# Altium PCB PCB1.PcbDoc
Units mil, origin at the board's own origin, x right, y up, seen from the top; angles counter-clockwise.
Board outline 3310 x 2855 mil, 2 copper layers (Top Layer, Bottom Layer); 3 components, 9 nets, 61 pads, 1 vias.
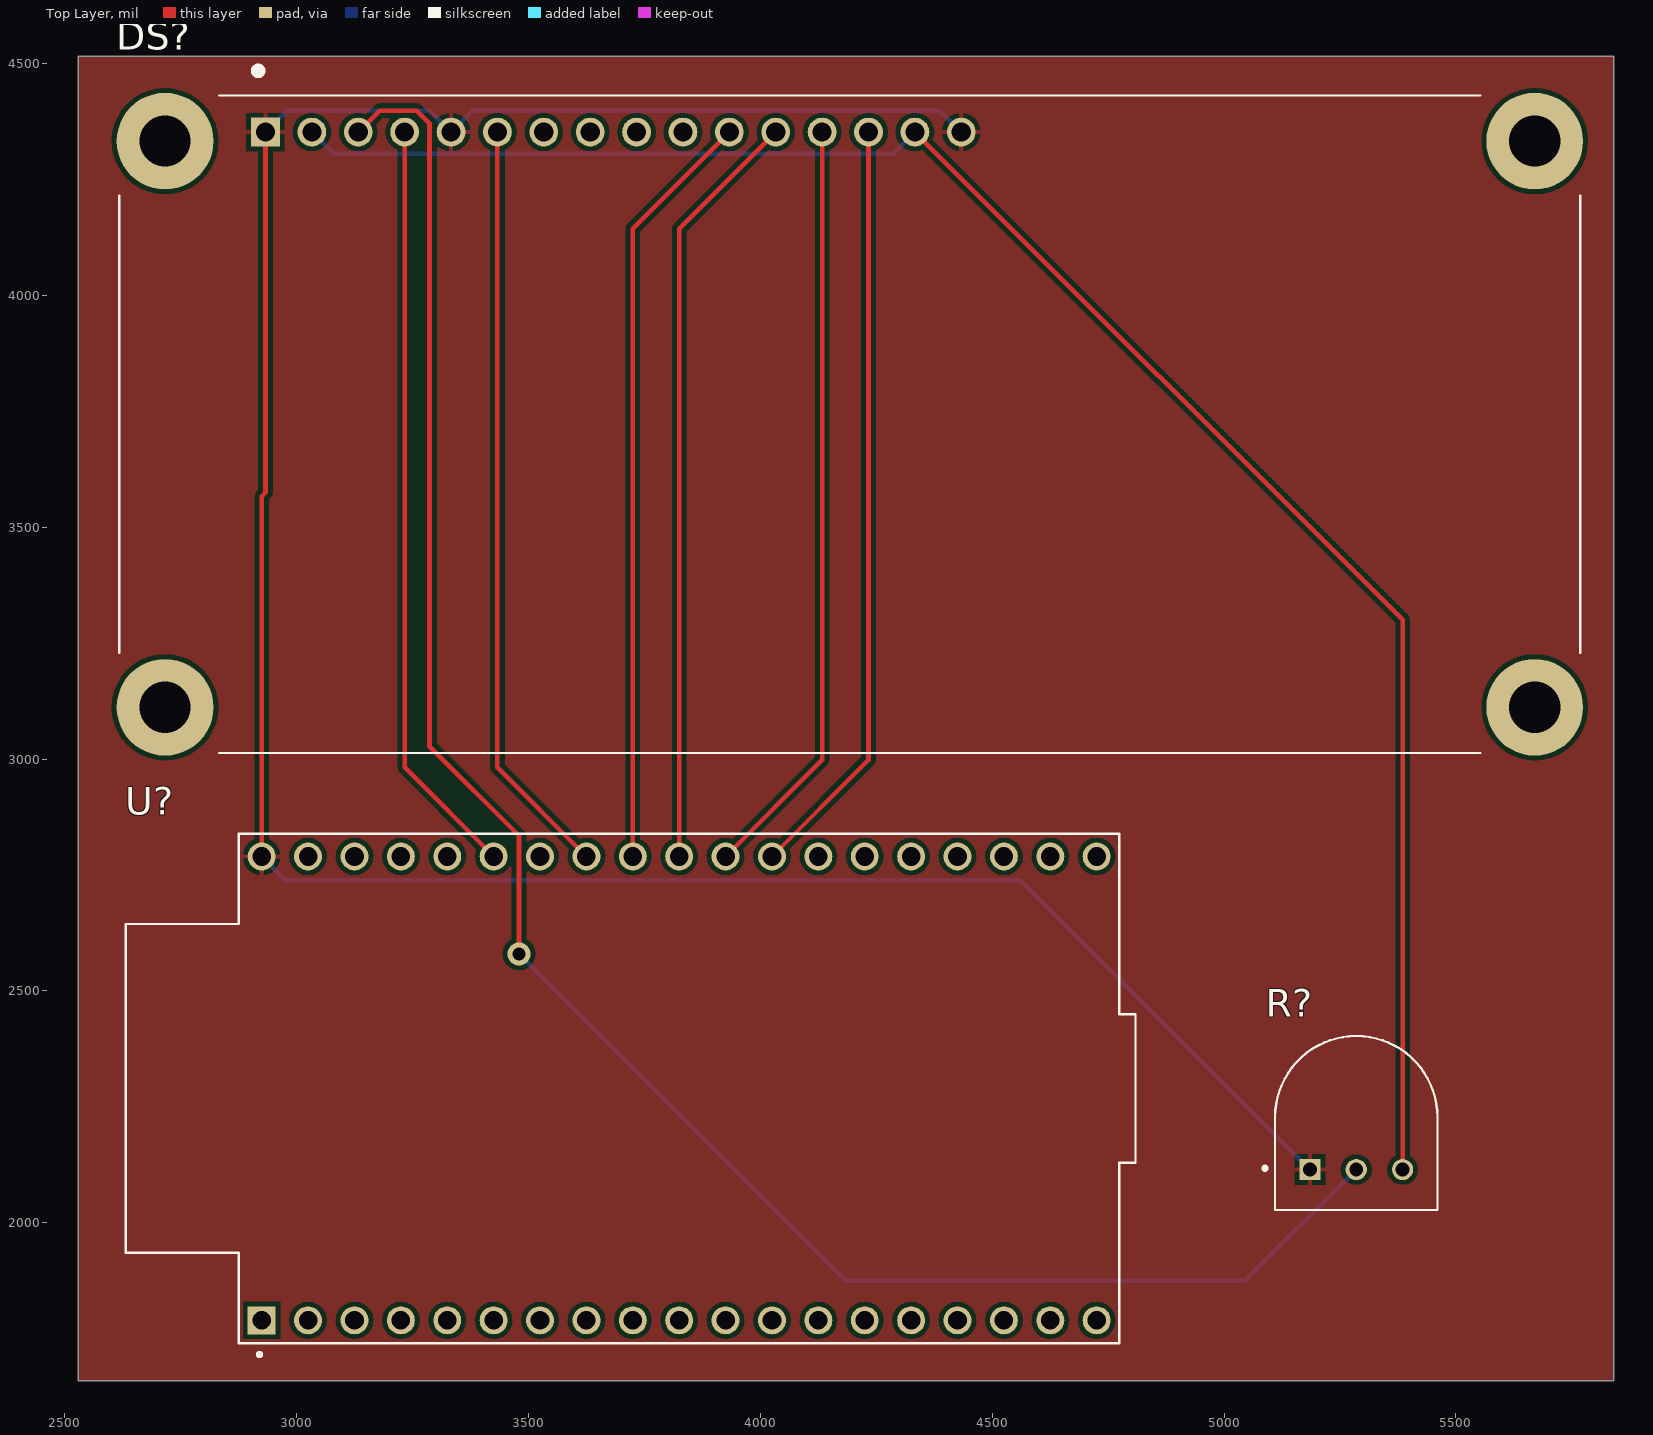
[diagram p0: Top Layer view]
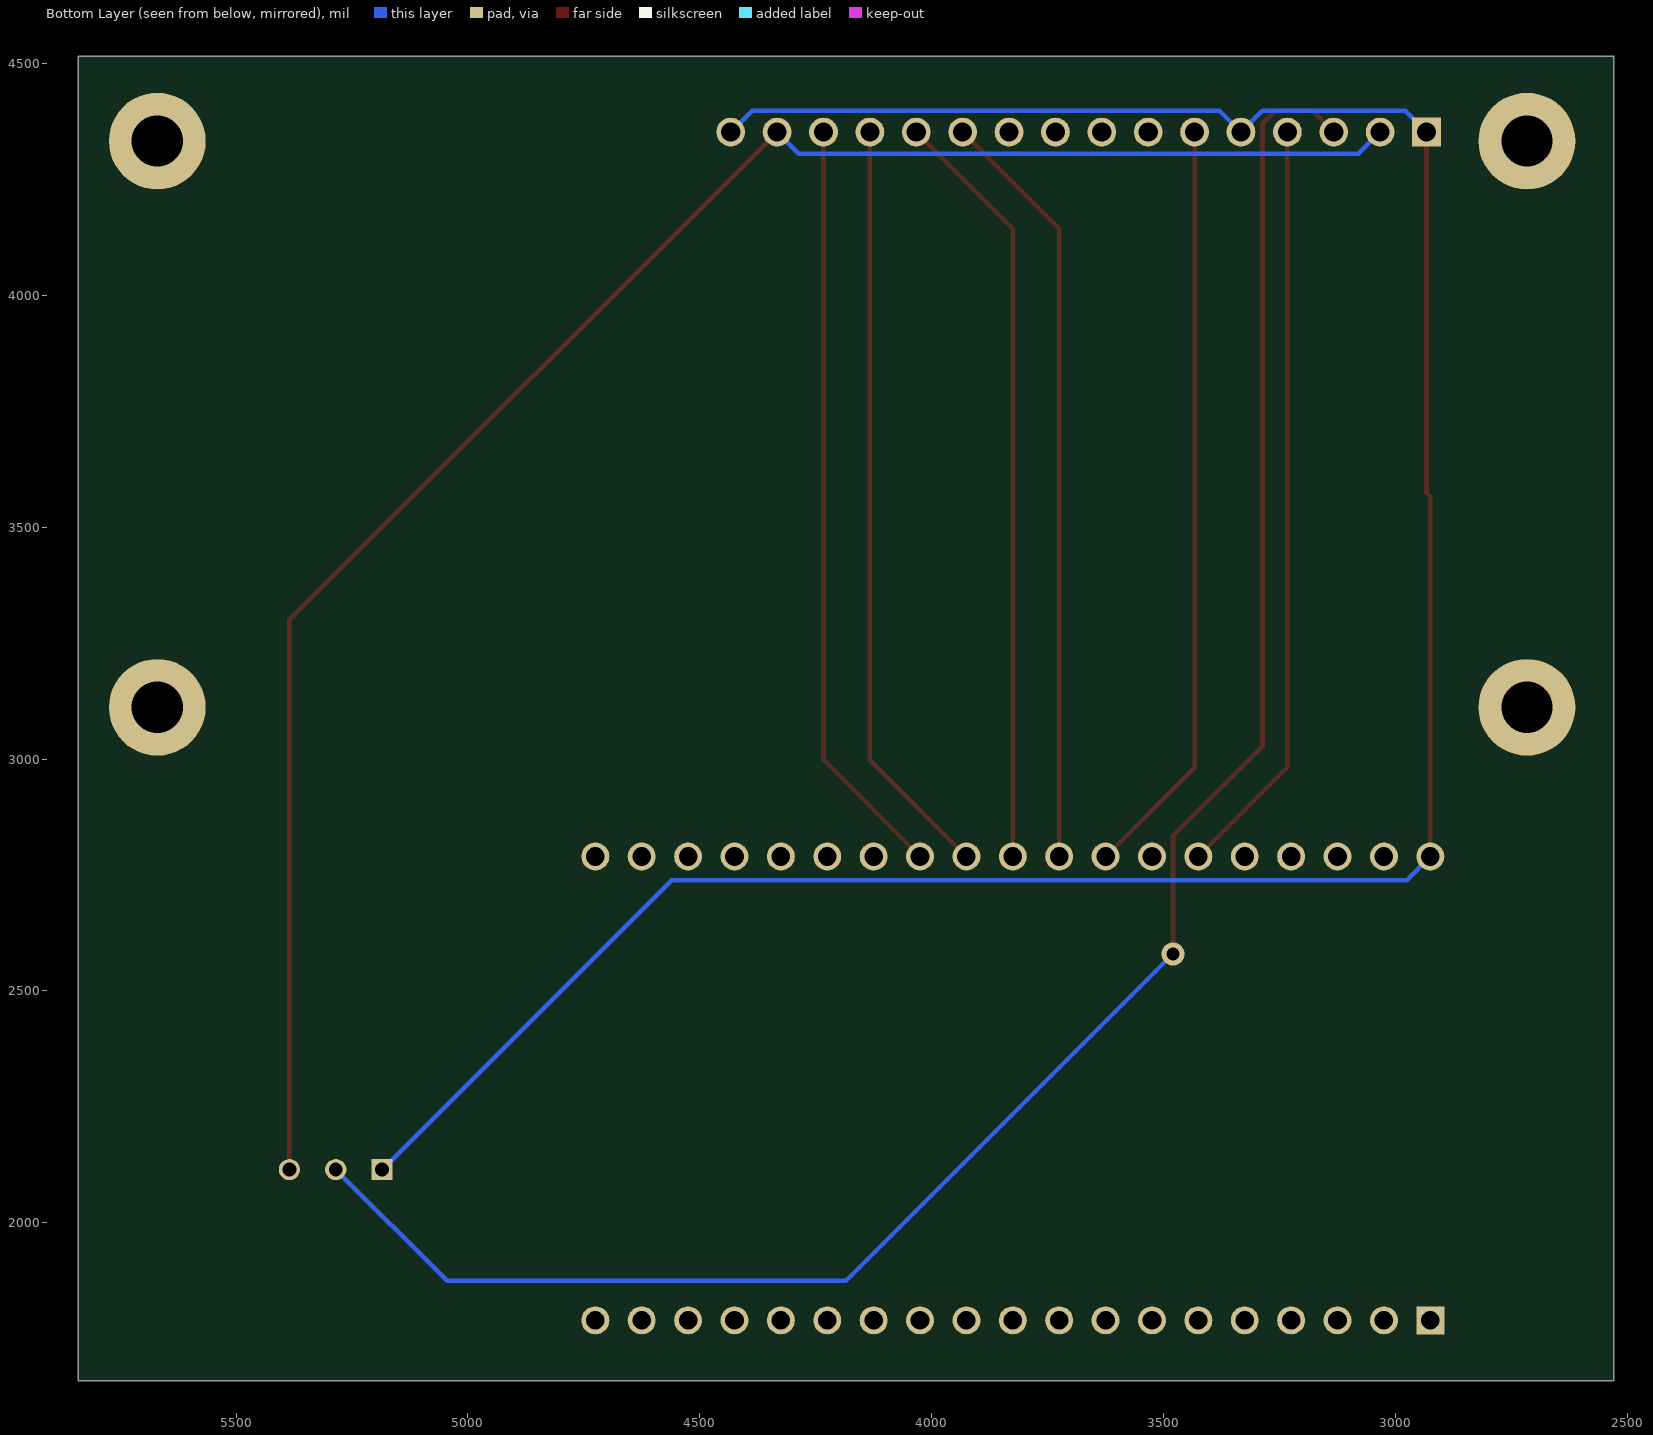
[diagram p1: Bottom Layer view, seen from below]
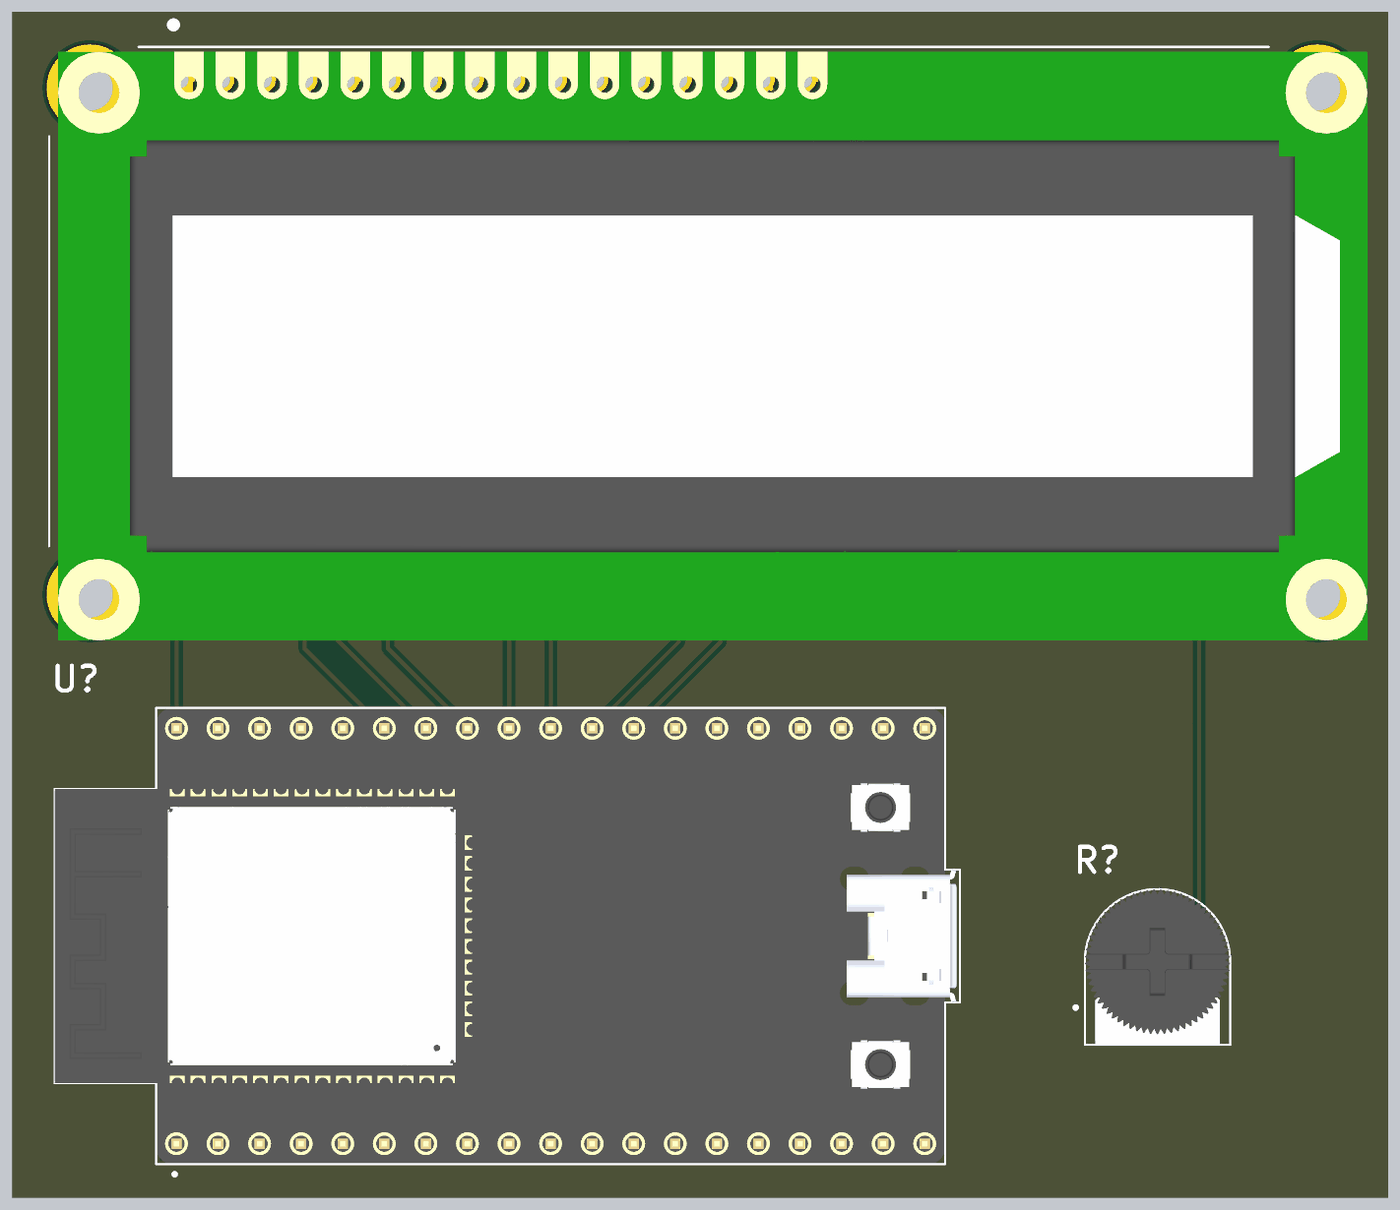
[diagram p2: 3D render of the assembled board from above, using the file's embedded part models]

## Layer stack, top to bottom
Top Solder: solder mask 0.4, Solder Resist, Dk 3.5
Top Layer: signal copper 1.4
Dielectric 1: dielectric 12.6, FR-4, Dk 4.8
Bottom Layer: signal copper 1.4
Bottom Solder: solder mask 0.4, Solder Resist, Dk 3.5

## Board outline
2530,1660 5840,1660 5840,4515 2530,4515

## Design rules (kind name [scope] priority, off if disabled: settings)
Clearance [All] p1: gap=10 ignorepadtopadclearanceinfootprint=FALSE except(0: Arc-Hole Track-Hole SMDPad-Hole THPad-Hole Via-Hole Fill-Hole Poly-Hole Region-Hole Text-Hole)
PolygonConnect [All] p1: connectstyle=Relief reliefconductorwidth=10 reliefentries=4 polygonreliefangle="90 Angle" airgapwidth=10
RoutingVias [All] p1: holewidth=28 width=50 viastyle="Through Hole" minholewidth=28 minwidth=50 maxholewidth=28 maxwidth=50
SolderMaskExpansion [All] p1: expansion=4 istentingtop=FALSE
Width [All] p1: maxlimit=10 minlimit=10 preferedwidth=10
30 further rules are at their usual default settings.

## Components (designator, comment, footprint, x,y, rotation, side; value= is the part's Value field where it differs from the comment)
DS? "NHD-14432WG-BTFH-V#T" LCD_NHD-14432WG-BTFH-V#T 4215,3710 r0 top
R? "3352T-1-200" TRIM_3352T-1-200 5285,2227.99 r0 top
U? "ESP32-DEVKITC" MODULE_ESP32-DEVKITC 3825,2290 r90 top

## Footprints (in the part's own frame and the unit in brackets; to place one, negate y for a bottom-side part, rotate by r counter-clockwise, add the part's x,y. Pads: shape width x height; smd on the part's side, far side on the other; paste and mask are expansions set on the pad)
LCD_NHD-14432WG-BTFH-V#T [mm]
  rect 1.575x1.575 / inner round 1.575 / far side rect 1.575x1.575 hole 1.05: 1(-32.55,16.3)
  round 1.575 hole 1.05: 2(-30.01,16.3) 3(-27.47,16.3) 4(-24.93,16.3) 5(-22.39,16.3) 6(-19.85,16.3) 7(-17.31,16.3) 8(-14.77,16.3) 9(-12.23,16.3) 10(-9.69,16.3) 11(-7.15,16.3) 12(-4.61,16.3) 13(-2.07,16.3) 14(0.47,16.3) 15(3.01,16.3) 16(5.55,16.3)
  round 5.3 hole 2.8: S1(-38.05,15.8) S2(-38.05,-15.2) S3(36.95,15.8) S4(36.95,-15.2)
  silkscreen extent -40.55,-17.7 39.45,19.85, body extent -40,-18 40,18, height 10.2
MODULE_ESP32-DEVKITC [mm]
  rect 1.53x1.53 / inner round 1.53 / far side rect 1.53x1.53 hole 1.02: 1(-12.7,22.85)
  round 1.53 hole 1.02: 2(-12.7,20.31) 3(-12.7,17.77) 4(-12.7,15.23) 5(-12.7,12.69) 6(-12.7,10.15) 7(-12.7,7.61) 8(-12.7,5.07) 9(-12.7,2.53) 10(-12.7,-0.01) 11(-12.7,-2.55) 12(-12.7,-5.09) 13(-12.7,-7.63) 14(-12.7,-10.17) 15(-12.7,-12.71) 16(-12.7,-15.25) 17(-12.7,-17.79) 18(-12.7,-20.33) 19(-12.7,-22.87) 20(12.7,-22.87) 21(12.7,-20.33) 22(12.7,-17.79) 23(12.7,-15.25) 24(12.7,-12.71) 25(12.7,-10.17) 26(12.7,-7.63) 27(12.7,-5.09) 28(12.7,-2.55) 29(12.7,-0.01) 30(12.7,2.53) 31(12.7,5.07) 32(12.7,7.61) 33(12.7,10.15) 34(12.7,12.69) 35(12.7,15.23) 36(12.7,17.77) 37(12.7,20.31) 38(12.7,22.85)
  silkscreen extent -14.67,-25 13.95,30.3, body extent -13.97,-24.8 13.97,30.3, height 3.25
TRIM_3352T-1-200 [mm]
  rect 1.16x1.16 hole 0.76: 1(-2.54,-2.87)
  round 1.16 hole 0.76: 2(0,-2.87) 3(2.54,-2.87)
  silkscreen extent -5.1,-5.08 4.44,4.44, body extent -4.44,-5.08 4.44,4.44, height 4.32

## Part data
DS?: "- Graphic LCD Display Module Transflective Black (White - Inverted) FSTN - Film Super-Twisted Nematic Parallel, 8-Bit - 144 x 32", Package=None, Availability="In Stock", Check_prices=https://www.snapeda.com/parts/NHD-14432WG-BTFH-V%23T/Newhaven+Display+Intl/view-part/?ref=eda, MF="Newhaven Display", MP=NHD-14432WG-BTFH-V#T, Price=None, Purchase-URL=https://pricing.snapeda.com/search/part/NHD-14432WG-BTFH-V#T/?ref=eda, SnapEDA_Link=https://www.snapeda.com/parts/NHD-14432WG-BTFH-V%23T/Newhaven+Display+Intl/view-part/?ref=snap
R?: "20 Ohms 0.5W, 1/2W Through Hole Thumbwheel Potentiometer Top Adjustment", Package="3352T-3 Bourns", Availability="In Stock", Check_prices=https://www.snapeda.com/parts/3352T-1-200/Bourns/view-part/?ref=eda, MF=Bourns, MP=3352T-1-200, Price=None, Purchase-URL=https://pricing.snapeda.com/search/part/3352T-1-200/?ref=eda, SnapEDA_Link=https://www.snapeda.com/parts/3352T-1-200/Bourns/view-part/?ref=snap
U?: "ESP32-WROOM-32UE series Transceiver; 802.11 b/g/n (Wi-Fi, WiFi, WLAN), Bluetooth Â® Smart Ready 4.x Dual Mode Evaluation Board", Package=None, Availability="In Stock", Check_prices=https://www.snapeda.com/parts/ESP32-DEVKITC/Espressif+Systems/view-part/?ref=eda, MF="Espressif Systems", MP=ESP32-DEVKITC, Price=None, Purchase-URL=https://pricing.snapeda.com/search/part/ESP32-DEVKITC/?ref=eda, SnapEDA_Link=https://www.snapeda.com/parts/ESP32-DEVKITC/Espressif+Systems/view-part/?ref=snap

## Via types
v1: diameter 50, hole 28, Top Layer to Bottom Layer, 1 vias

## Nets (pads, with @x,y where several pads share a name; then routed paths per layer and width w, separated by ;. In a path a pad name is that pad's centre, name@x,y a point inside that pad or via, vN(x,y) a via of type N, cw(c..) or ccw(c..) an arc to the next point about the centre after c; other vN are vias at no path point)
GND: DS?.1 DS?.5 DS?.16 R?.1 U?.38 | length 5681
  Top Layer w10: U?.38 2925.39,3566 2933.5,3574.11 DS?.1
  Bottom Layer w10: U?.38 2976.39,2739 4561,2739 R?.1 ; DS?.1 2979.77,4398 3287.24,4398 DS?.5 3379.77,4398 4387.24,4398 DS?.16
NetDS?_3: DS?.3 R?.2 | length 4251.2
  Top Layer w10: DS?.3 3179.77,4398 3260,4398 3287,4371 3287,3028 3480,2835 v1(3480,2580)
  Bottom Layer w10: v1(3480,2580) 4185,1875 5045,1875 R?.2
NetDS?_4: DS?.4 U?.33 | length 1641.2
  Top Layer w10: DS?.4 3233.5,2981.89 U?.33
NetDS?_6: DS?.6 U?.31 | length 1641.2
  Top Layer w10: DS?.6 3433.5,2981.89 U?.31
NetDS?_11: DS?.11 U?.30 | length 1647.9
  Top Layer w10: U?.30 3725.39,4143.62 DS?.11
NetDS?_12: DS?.12 U?.29 | length 1647.9
  Top Layer w10: U?.29 3825.39,4143.62 DS?.12
NetDS?_13: DS?.13 U?.28 | length 1647.9
  Top Layer w10: U?.28 4133.5,2998.11 DS?.13
NetDS?_14: DS?.14 U?.27 | length 1647.9
  Top Layer w10: U?.27 4233.5,2998.11 DS?.14
VCC: DS?.2 DS?.15 R?.3 | length 4011
  Top Layer w10: DS?.15 5385,3300.24 R?.3
  Bottom Layer w10: DS?.2 3080.24,4305 4286.77,4305 DS?.15
pads on no net: DS?.7 DS?.8 DS?.9 DS?.10 DS?.S1 DS?.S2 DS?.S3 DS?.S4 U?.1 U?.2 U?.3 U?.4 U?.5 U?.6 U?.7 U?.8 U?.9 U?.10 U?.11 U?.12 U?.13 U?.14 U?.15 U?.16 U?.17 U?.18 U?.19 U?.20 U?.21 U?.22 U?.23 U?.24 U?.25 U?.26 U?.32 U?.34 U?.35 U?.36 U?.37

## Polygon pours and split planes (outlines as drawn)
GND on Top Layer "GND_L01_P000" (solid, remove dead copper, pour order 0): 2530,1660 5840,1660 5840,4515 2530,4515